# Altium PCB SolarSense.PcbDoc (part 2 of 2)
Units mm, origin at the board's own origin, x right, y up, seen from the top; angles counter-clockwise.
Board outline 200 x 150 mm, 2 copper layers (Top Layer, Bottom Layer); 190 components, 120 nets, 670 pads, 0 vias.
Unrouted connection lines stored in the file: 491.
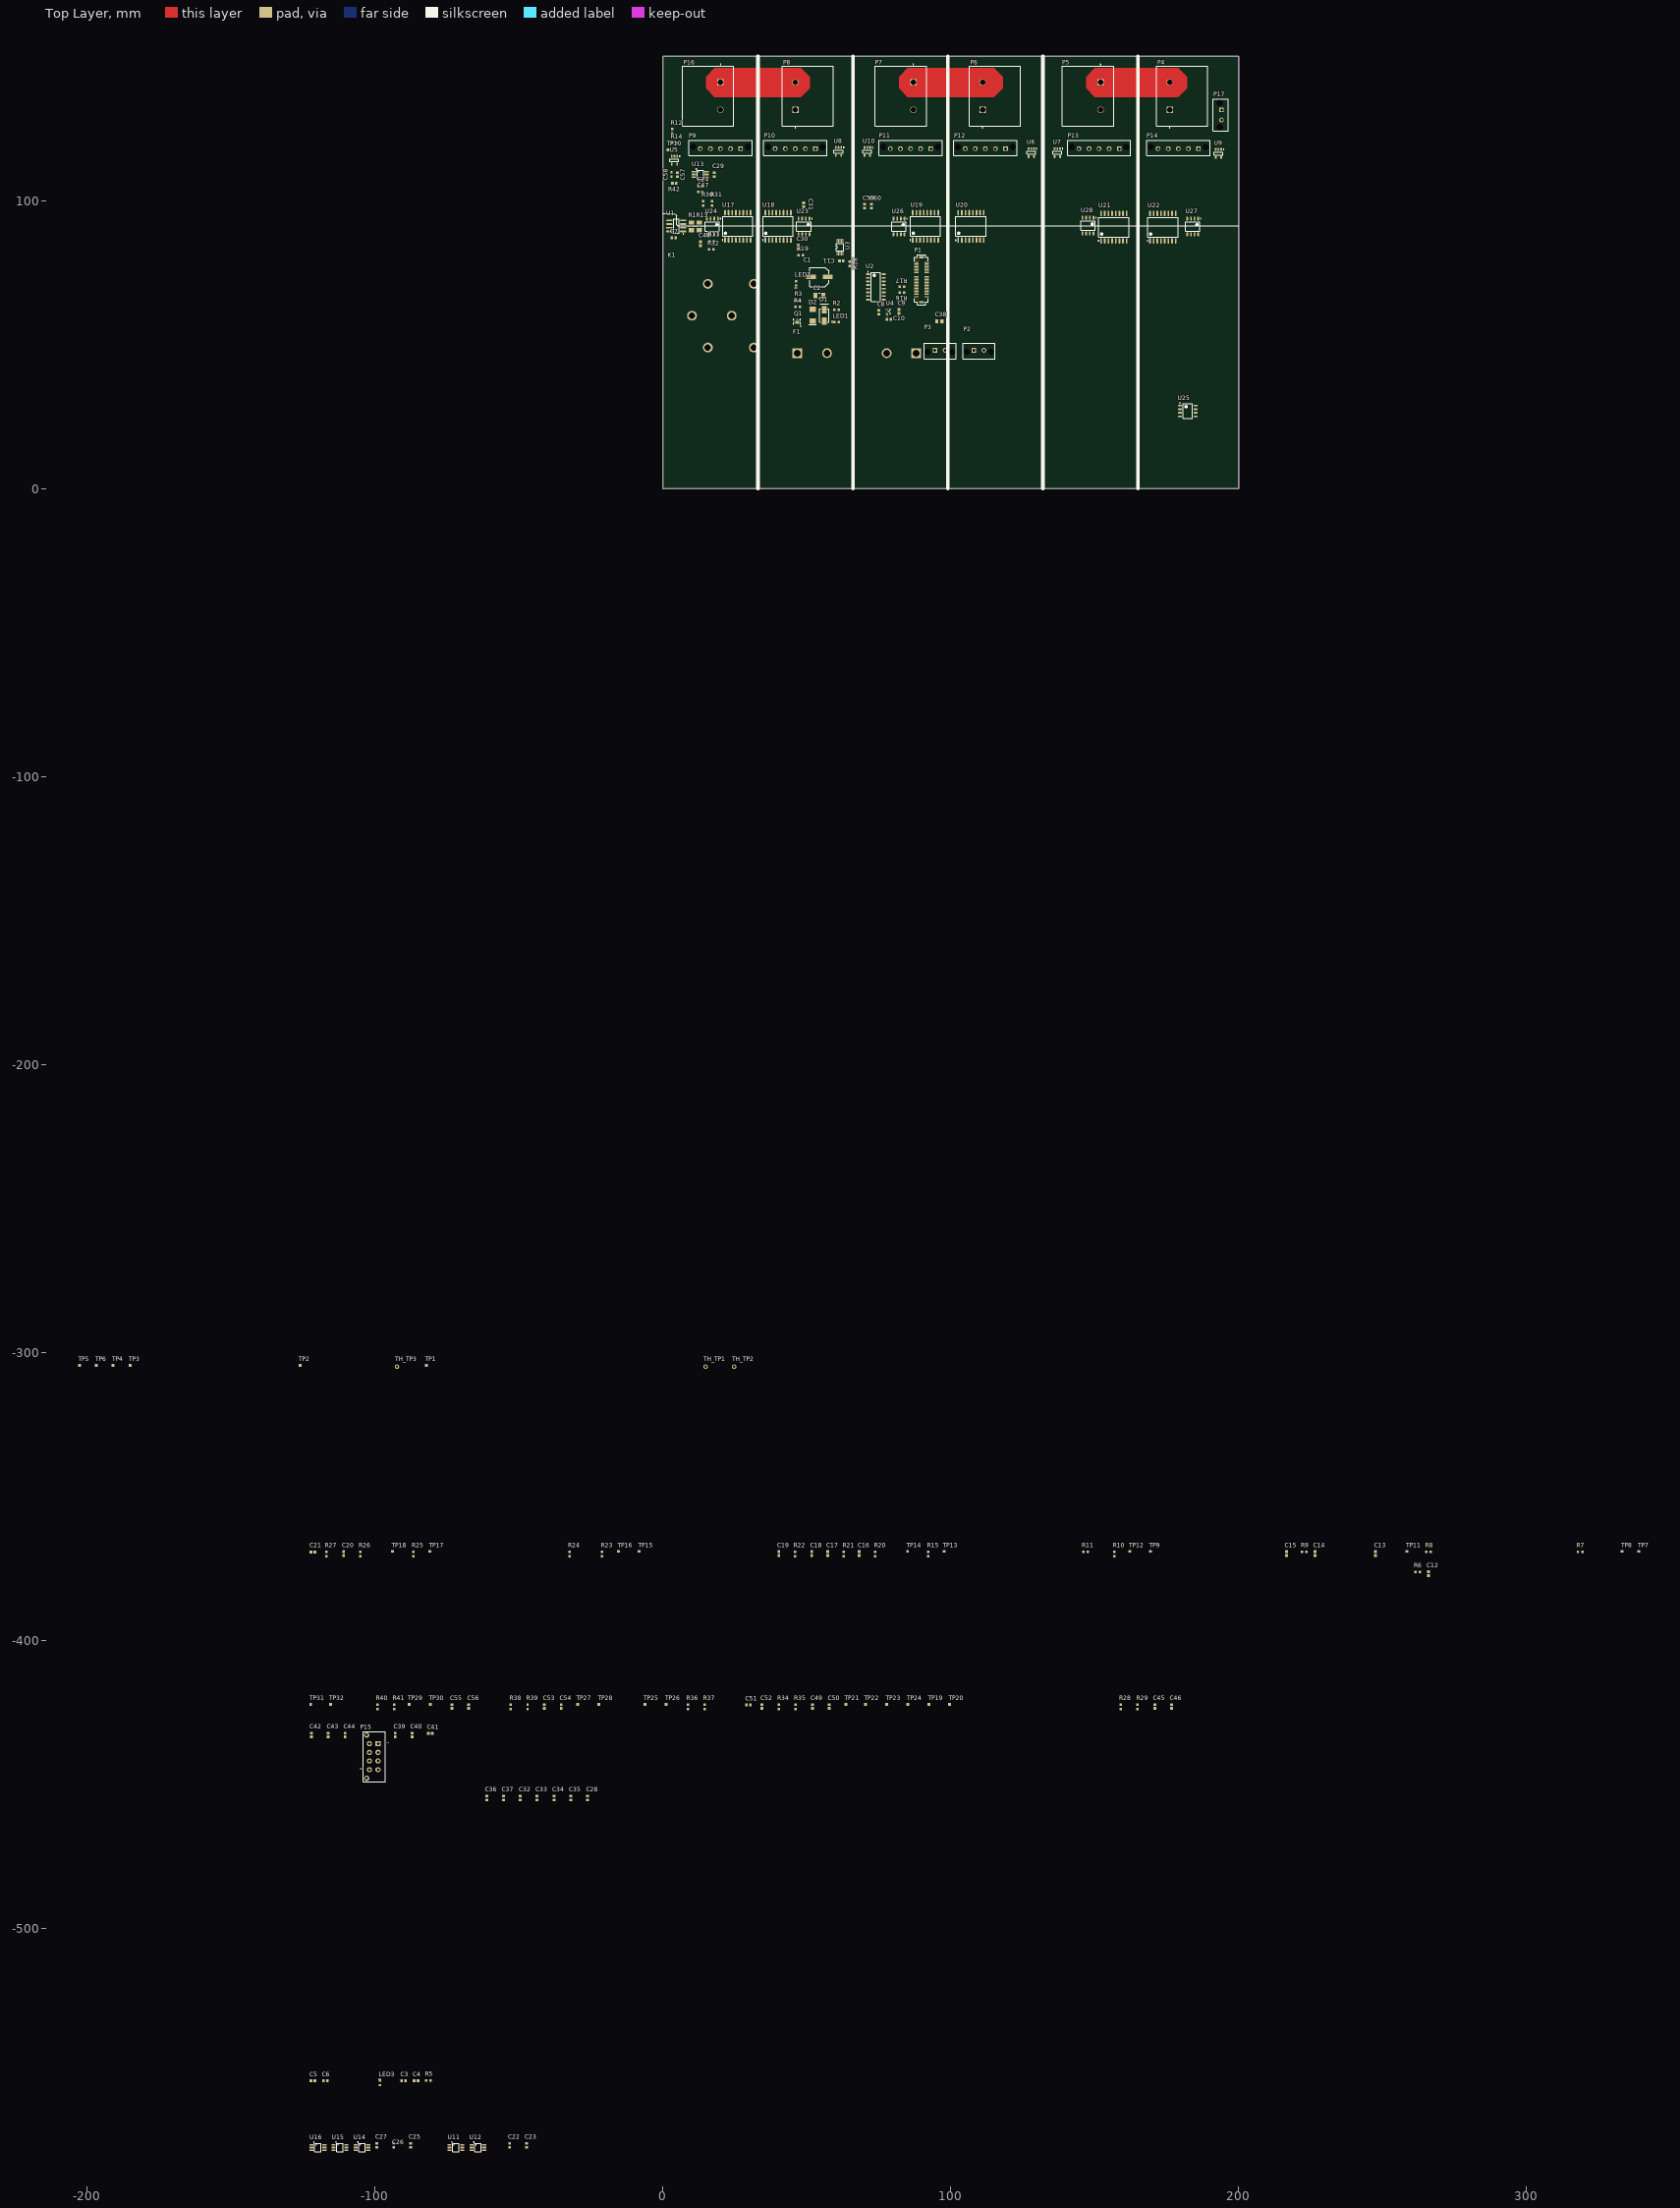
[diagram p0: Top Layer view]

## Part data (continued)
R28 R29 R30 R31 R32 R33 R34 R35 R36 R37 R38 R39 R40 R41: library part "RES 1K OHM 5% 1/10W 0603", "1k Ohm ±5% 0.1W, 1/10W Chip Resistor 0603 (1608 Metric)", Manufacturer=Yageo, Manufacturer Part Number=RC0603JR-071KL, Operating Temperature="-55°C ~ 155°C", Package / Case="0603 (1608 Metric)", Power (Watts)="0.1W, 1/10W", Resistance (Ohms)=1k, Supplier Device Package=0603, Supplier Part Number 1=311-1.0KGRCT-ND, Temperature Coefficient=±100ppm/°C, Tolerance=±5%, Category=Resistors, ComponentLink1Description=http://www.yageo.com/documents/recent/PYu-RC_Group_51_RoHS_L_7.pdf, ComponentLink1URL=http://www.yageo.com/documents/recent/PYu-RC_Group_51_RoHS_L_7.pdf, Composition="Thick Film", Failure Rate=-, Features="Moisture Resistant", Height - Seated (Max)="0.022\" (0.55mm)", Packaging="Cut Tape (CT)", Part Status=Active, Pricing 1="1=0.15, 10=0.017, 100=0.0071, 1000=0.0032, 2500=0.00278 (CAD)", RoHS="RoHS Compliant", Size / Dimension="0.063\" L x 0.031\" W (1.60mm x 0.80mm)", Stock 1=4415240, Supplier 1=Digi-Key
TH_TP1 TH_TP2 TH_TP3: library part "Thru Test Point"
TP1 TP2 TP3 TP4 TP5 TP6 TP7 TP8 TP9 TP10 TP11 TP12 TP13 TP14 TP15 TP16 TP17 TP18 TP19 TP20 TP21 TP22 TP23 TP24 TP25 TP26 TP27 TP28 TP29 TP30 TP31 TP32: library part "Test Point"
U1: "Current Sensor 10A 1 Channel Hall Effect, Open Loop Unidirectional 8-SOIC (0.154\", 3.90mm Width)", Current - Sensing=10A, Current - Supply (Max)=12mA, Frequency="DC ~ 80kHz", Manufacturer="Allegro MicroSystems, LLC", Manufacturer Part Number=ACS722LLCTR-10AU-T, Operating Temperature="-40°C ~ 150°C", Package / Case="8-SOIC (0.154\", 3.90mm Width)", Supplier Part Number 1=620-1636-1-ND, Voltage - Supply="3 V ~ 3.6 V", Accuracy=±3%, Category="Sensors, Transducers", ComponentLink1Description=http://www.allegromicro.com/~/media/Files/Datasheets/ACS722-Datasheet.ashx, ComponentLink1URL=http://www.allegromicro.com/~/media/Files/Datasheets/ACS722-Datasheet.ashx, For Measuring=DC, Linearity=±1%, Mounting Type="Surface Mount", Output="Ratiometric, Voltage", Packaging="Cut Tape (CT)", Part Status=Active, Polarization=Unidirectional, Pricing 1="1=8.22, 5=7.25, 10=6.404, 25=5.1948, 50=4.5908, 100=4.4701, 500=3.74526, 1000=3.50362 (CAD)", Response Time=5µs, RoHS="RoHS Compliant", Sensitivity=264mV/A, Sensor Type="Hall Effect, Open Loop", Stock 1=5711, Supplier 1=Digi-Key
U2: "Decoder/Demultiplexer 1 x 3:8 16-SOIC", Case/Package=SOIC, High Level Output Current=4mA, Manufacturer="ON Semiconductor", Manufacturer Part Number=MC74LVX138DR2G, Max Operating Temperature=85°C, Max Supply Voltage=3.6V, Min Operating Temperature=-40°C, Min Supply Voltage=2V, Package Quantity=2500, Quiescent Current=4uA, Supplier Part Number 1=MC74LVX138DR2GOSCT-ND, Category="Decoders, Multiplexers", ComponentLink1Description=https://datasheet.ciiva.com/6615/mc74lvx138-d-6615404.pdf?src-supplier=Digi-Key, ComponentLink1URL=https://datasheet.ciiva.com/6615/mc74lvx138-d-6615404.pdf?src-supplier=Digi-Key, ComponentLink2Description=https://datasheet.ciiva.com/16386/mc74lvx138-d-16386958.pdf?src-supplier=Future+Electronics, ComponentLink2URL=https://datasheet.ciiva.com/16386/mc74lvx138-d-16386958.pdf?src-supplier=Future+Electronics, ComponentLink3Description=https://datasheet.ciiva.com/6615/mc74lvx138-d-6615402.pdf?src-supplier=Digi-Key, ComponentLink3URL=https://datasheet.ciiva.com/6615/mc74lvx138-d-6615402.pdf?src-supplier=Digi-Key, ComponentLink4Description=https://datasheet.ciiva.com/6615/mc74lvx138-d-6615405.pdf?src-supplier=Digi-Key, ComponentLink4URL=https://datasheet.ciiva.com/6615/mc74lvx138-d-6615405.pdf?src-supplier=Digi-Key, Halogen Free="Halogen Free", Height=1.5mm, Independent Circuits=1, Lead Free="Lead Free", Length=10mm, Logic Function=Demultiplexer,Decoder, Low Level Output Current=4mA, Mount="Surface Mount", Number of Elements=1, Number of Input Lines=3, Number of Inputs=3, Number of Output Lines=8, Number of Outputs=8, Number of Pins=16, Packaging="Tape and Reel", Polarity=Inverting, Pricing 1="1=0.45000, 10=0.36100, 100=0.24590, 500=0.18442, 1000=0.13831 (USD)", Propagation Delay=23ns, RoHS=Yes, Stock 1=2170, Supplier 1=Digi-Key, Supply Type=Single, Turn-On Delay Time=23ns, Width=4mm
U3: library part "IC ADC 12-BIT VSSOP-10", "12 Bit Analog to Digital Converter 4 Input 1 Sigma-Delta 10-VSSOP", Manufacturer="Texas Instruments", Manufacturer Part Number=ADS1015IDGSR, Operating Temperature="-40°C ~ 125°C", Package / Case="10-TFSOP, 10-MSOP (0.118\", 3.00mm Width)", Supplier Device Package=10-VSSOP, Supplier Part Number 1=296-41185-1-ND, Voltage - Supply, Analog="2 V ~ 5.5 V", Architecture=Sigma-Delta, Category="Integrated Circuits (ICs)", ComponentLink1Description=http://www.ti.com/lit/ds/symlink/ads1013.pdf, ComponentLink1URL=http://www.ti.com/lit/ds/symlink/ads1013.pdf, Configuration=MUX-PGA-ADC, Data Interface=I²C, Features="PGA, Selectable Address", Input Type="Differential, Single Ended", Number of A/D Converters=1, Number of Bits=12, Number of Inputs="2, 4", Packaging="Cut Tape (CT)", Part Status=Active, Pricing 1="1=4.25, 10=3.807, 100=3.1194, 500=2.65552, 1000=2.23959 (CAD)", Ratio - S/H:ADC=-, Reference Type=Internal, RoHS="RoHS Compliant", Sampling Rate (Per Second)=3.3k, Stock 1=4084, Supplier 1=Digi-Key, Voltage - Supply, Digital="2 V ~ 5.5 V"
U4: library part "IC REG LDO 3V 0.2A 4-TDFN", Current - Limit (Min)=250mA, Current - Output=200mA, Manufacturer="Microchip Technology", Manufacturer Part Number=MIC94310-PYMT-TR, Operating Temperature="-40°C ~ 125°C", Package / Case="4-UFDFN Exposed Pad", Supplier Device Package="4-TDFN (1.2x1.6)", Supplier Part Number 1=576-4761-1-ND, Voltage - Dropout (Typical)="0.04V @ 200mA", Voltage - Input="Up to 3.6V", Voltage - Output=3V, Category="Integrated Circuits (ICs)", ComponentLink1Description=http://www.microchip.com/mymicrochip/filehandler.aspx?ddocname=en580409, ComponentLink1URL=http://www.microchip.com/mymicrochip/filehandler.aspx?ddocname=en580409, Mounting Type="Surface Mount", Packaging="Cut Tape (CT)", Part Status=Active, Pricing 1="1=0.45, 25=0.3708, 100=0.3386 (CAD)", Regulator Topology="Positive Fixed", RoHS="RoHS Compliant", Stock 1=4802, Supplier 1=Digi-Key
U5 U6 U7 U8 U9 U10: "General Purpose Amplifier 1 Circuit Rail-to-Rail SOT-23-5", Current - Output / Channel=50mA, Current - Supply=400µA, Manufacturer 1="Texas Instruments", Manufacturer Part Number 1=TLV316QDBVRQ1, Operating Temperature="-40°C ~ 125°C", Package / Case="SC-74A, SOT-753", Supplier Device Package=SOT-23-5, Supplier Part Number 1=296-45323-1-ND, Voltage - Supply, Single/Dual (±)="1.8 V ~ 5.5 V, ±0.9 V ~ 2.75 V", -3db Bandwidth=-, Amplifier Type="General Purpose", Category="Integrated Circuits (ICs)", ComponentLink1Description=http://www.ti.com/lit/ds/symlink/tlv316-q1.pdf, ComponentLink1URL=http://www.ti.com/lit/ds/symlink/tlv316-q1.pdf, Description 1="IC OP AMP GP RR 10MHZ 5-SOT-23", Mounting Type="Surface Mount", Number of Circuits=1, Output Type=Rail-to-Rail, Packaging="Cut Tape (CT)", Part Status=Active, Pricing 1="1=1.33, 10=1.185, 100=0.9234, 500=0.76276, 1000=0.60218 (CAD)", RoHS="RoHS Compliant", Slew Rate="6 V/µs", Stock 1=1747, Supplier 1=Digi-Key
U11 U12 U13 U14 U15 U16: "16 Bit Analog to Digital Converter 2 Input 1 Sigma-Delta 10-MSOP", Base Part Number=MCP3427, Manufacturer="Microchip Technology", Manufacturer Part Number=MCP3427-E/UN, Operating Temperature="-40°C ~ 125°C", Package / Case="10-TFSOP, 10-MSOP (0.118\", 3.00mm Width)", Supplier Device Package=10-MSOP, Supplier Part Number 1=MCP3427-E/UN-ND, Voltage - Supply, Analog="2.7 V ~ 5.5 V", Architecture=Sigma-Delta, Category="Integrated Circuits (ICs)", ComponentLink1Description=http://www.microchip.com/mymicrochip/filehandler.aspx?ddocname=en546216, ComponentLink1URL=http://www.microchip.com/mymicrochip/filehandler.aspx?ddocname=en546216, Configuration=MUX-PGA-ADC, Data Interface=I²C, Features="PGA, Selectable Address", Input Type=Differential, Number of Bits=16, Number of Inputs=2, Packaging=Tube, Part Status=Active, Pricing 1="1=4.32, 25=3.6064, 100=3.2704 (CAD)", Ratio - S/H:ADC=-, Reference Type=Internal, RoHS="RoHS Compliant", Sampling Rate (Per Second)=15, Stock 1=3001, Supplier 1=Digi-Key, Voltage - Supply, Digital="2.7 V ~ 5.5 V"
U17 U18 U19 U20 U21 U22: "General Purpose Digital Isolator 5000Vrms 4 Channel 100Mbps 100kV/µs CMTI 16-SOIC (0.295\", 7.50mm Width)", Manufacturer 1="Texas Instruments", Manufacturer Part Number 1=ISOW7841FDWER, Max Operating Temperature=125°C, Min Operating Temperature=-40°C, ComponentLink3Description=http://www.ti.com/lit/ds/symlink/isow7841.pdf?src-supplier=Digi-Key, ComponentLink3URL=http://www.ti.com/lit/ds/symlink/isow7841.pdf?src-supplier=Digi-Key, ComponentLink4Description=http://www.ti.com/general/docs/lit/getliterature.tsp?genericPartNumber=ISOW7841&fileType=pdf&src-supplier=Farnell, ComponentLink4URL=http://www.ti.com/general/docs/lit/getliterature.tsp?genericPartNumber=ISOW7841&fileType=pdf&src-supplier=Farnell, Number of Channels=4, Pricing 1="1=9.44000, 10=8.50000, 25=7.93000, 100=7.12000, 250=6.64000, 500=5.78000, 750=5.00000, 1000=4.90000 (USD)", RoHS=No, Stock 1=4512, Supplier 1="TI store", Supplier Part Number 1=ISOW7841FDWER
U23 U24 U25 U26 U27 U28: "I²C Digital Isolator 2500Vrms 2 Channel 1Mbps 25kV/µs CMTI 8-SOIC (0.154\", 3.90mm Width)", Case/Package=SOIC, Isolated Power=No, Manufacturer="Texas Instruments", Manufacturer Part Number=ISO1540DR, Max Operating Temperature=125°C, Max Supply Voltage=5.5V, Min Operating Temperature=-40°C, Min Supply Voltage=3V, Nominal Supply Current=3.6mA, Package Quantity=1, Supplier Part Number 1=296-34871-1-ND, Working Voltage=566V, Category="Interface ICs", Channel Type=Bidirectional, ComponentLink1Description=https://datasheet.ciiva.com/6579/iso1540-6579723.pdf?src-supplier=Digi-Key, ComponentLink1URL=https://datasheet.ciiva.com/6579/iso1540-6579723.pdf?src-supplier=Digi-Key, ComponentLink2Description=https://datasheet.ciiva.com/6579/iso1540-6579724.pdf?src-supplier=Digi-Key, ComponentLink2URL=https://datasheet.ciiva.com/6579/iso1540-6579724.pdf?src-supplier=Digi-Key, ComponentLink3Description=https://datasheet.ciiva.com/6579/iso1540-6579725.pdf?src-supplier=Digi-Key, ComponentLink3URL=https://datasheet.ciiva.com/6579/iso1540-6579725.pdf?src-supplier=Digi-Key, ComponentLink4Description=https://datasheet.ciiva.com/14196/iso1540-14196749.pdf?src-supplier=Avnet, ComponentLink4URL=https://datasheet.ciiva.com/14196/iso1540-14196749.pdf?src-supplier=Avnet, Data Rate=1Mbps, Lead Free="Lead Free", Mount="Surface Mount", Number of Channels=2, Number of Pins=8, Packaging="Tape and Reel", Pricing 1="1=4.80000, 10=4.31400, 25=4.07880, 100=3.35370, 250=3.00924, 500=2.90048, 1000=2.41102 (USD)", Propagation Delay=70ns, Pulse Width Distortion (PWD)=21ns, REACH SVHC="No SVHC", RoHS=Yes, Stock 1=10427, Supplier 1=Digi-Key

## Nets (pads, with @x,y where several pads share a name; then routed paths per layer and width w, separated by ;. In a path a pad name is that pad's centre, name@x,y a point inside that pad or via, vN(x,y) a via of type N, cw(c..) or ccw(c..) an arc to the next point about the centre after c; other vN are vias at no path point)
3.3V: P15.1
3V0: C8.1 C10.1 U3.8 U4.1
3V3: C3.1 C4.1 C5.1 C6.1 C7.1 C9.1 C28.1 C30.1 C32.1 C34.1 C36.1 C39.1 C40.1 C41.1 C42.1 C43.1 C44.1 C46.1 C48.1 C50.1 C52.1 C54.1 C56.1 C59.1 P1.40 P1.41 P1.42 P1.43 P1.44 P1.45 R5.1 R16.1 R17.1 R19.1 R32.1 R33.1 TP6.TP U1.6 U1.8 U2.6 U2.16 U4.3 U4.4 U17.1 U18.1 U19.1 U20.1 U21.1 U22.1 U23.8 U24.8 U25.8 U26.8 U27.8 U28.8
12V: C1.1 C2.1 C38.1 D1.2 K1.A P1.47 P1.48 P1.49 P1.50 P3.1 R2.1 TP5.TP
ADC_SCL_1: R30.2 TP21.TP U13.8 U24.3
ADC_SCL_2: R28.2 R34.2 R38.2 R40.2 TP19.TP TP25.TP TP29.TP TP31.TP U11.8 U23.3 U25.3 U27.3 U28.3
ADC_SCL_3: R36.2 TP27.TP U12.8 U26.3
ADC_SCL_4: U16.8
ADC_SCL_5: U15.8
ADC_SCL_6: U14.8
ADC_SDA_1: R31.2 TP22.TP U13.7 U24.2
ADC_SDA_2: R29.2 R35.2 R39.2 R41.2 TP20.TP TP26.TP TP30.TP TP32.TP U11.7 U23.2 U25.2 U27.2 U28.2
ADC_SDA_3: R37.2 TP28.TP U12.7 U26.2
ADC_SDA_4: U16.7
ADC_SDA_5: U15.7
ADC_SDA_6: U14.7
CS_MPPT1: P9.2 U17.12
CS_MPPT2: P10.2 U18.12
CS_MPPT3: P11.2 U19.12
CS_MPPT4: P12.2 U20.12
CS_MPPT5: P13.2 U21.12
CS_MPPT6: P14.2 U22.12
GND: C1.2 C2.2 C3.2 C4.2 C5.2 C6.2 C7.2 C8.2 C9.2 C10.2 C11.2 C28.2 C30.2 C32.2 C34.2 C36.2 C38.2 C39.2 C40.2 C41.2 C42.2 C43.2 C44.2 C46.2 C48.2 C50.2 C52.2 C54.2 C56.2 C59.2 D2.1 LED2.2 LED3.2 P1.1 P1.2 P1.3 P1.4 P1.26 P1.27 P1.28 P1.29 P3.2 Q1.4 Q1.8 R4.2 TP4.TP U1.5 U2.4 U2.5 U2.8 U3.1 U3.3 U4.2 U4.5 U17.2 U17.8 U18.2 U18.8 U19.2 U19.8 U20.2 U20.8 U21.2 U21.8 U22.2 U22.8 U23.5 U24.5 U25.5 U26.5 U27.5 U28.5
HV_HIGH: P4.1 P17.1 P17.2 R22.1
HV_HIGH_NEG_BAT_TERM: F1.1 P2.1 P2.2 TH_TP1.TH_TP
HV_LOW: C24.2 C29.2 C47.2 C57.2 C58.2 P9.5 P16.2 R1.2 R13.2 R14.2 TH_TP3.TH_TP U1.3 U1.4 U5.2 U13.2 U13.3 U13.9 U13.10 U17.9 U17.10 U17.15 U24.4
MISO_MPPT1: P9.1 U17.11
MISO_MPPT2: P10.1 U18.11
MISO_MPPT3: P11.1 U19.11
MISO_MPPT4: P12.1 U20.11
MISO_MPPT5: P13.1 U21.11
MISO_MPPT6: P14.1 U22.11
MOSI_MPPT1: P9.4 U17.14
MOSI_MPPT2: P10.4 U18.14
MOSI_MPPT3: P11.4 U19.14
MOSI_MPPT4: P12.4 U20.14
MOSI_MPPT5: P13.4 U21.14
MOSI_MPPT6: P14.4 U22.14
MPPT_3V3_1: C24.1 C29.1 C47.1 C57.1 R30.1 R31.1 U5.5 U13.6 U17.16 U24.1
MPPT_3V3_2: C15.1 C22.1 C31.1 C45.1 R28.1 R29.1 U8.5 U11.6 U23.1
MPPT_3V3_3: C19.1 C23.1 C51.1 C60.1 R36.1 R37.1 U10.5 U12.6 U12.10 U18.16 U19.16 U26.1
MPPT_3V3_4: C12.1 C27.1 C37.1 C49.1 R34.1 R35.1 U6.5 U16.6 U16.9 U20.16 U25.1
MPPT_3V3_5: C14.1 C26.1 C33.1 C55.1 R40.1 R41.1 U7.5 U15.6 U15.9 U15.10 U21.16 U28.1
MPPT_3V3_6: C18.1 C25.1 C35.1 C53.1 R38.1 R39.1 U9.5 U14.6 U22.16 U27.1
MPPT_GND_2: C15.2 C17.2 C22.2 C31.2 C45.2 P8.2 P10.5 P16.1 R12.1 R21.2 U8.2 U11.2 U11.3 U11.9 U18.9 U18.10 U18.15 U23.4
MPPT_GND_3: C19.2 C21.2 C23.2 C51.2 C60.2 P7.2 P8.1 P11.5 R10.1 R27.2 U10.2 U12.2 U12.3 U12.9 U19.9 U19.10 U19.15 U26.4
MPPT_GND_4: C12.2 C13.2 C27.2 C37.2 C49.2 P6.2 P7.1 P12.5 R8.2 R23.1 U6.2 U16.2 U16.3 U20.9 U20.10 U20.15 U25.4
MPPT_GND_5: C14.2 C16.2 C26.2 C33.2 C55.2 P5.2 P6.1 P13.5 R6.1 R15.2 U7.2 U15.2 U15.3 U21.9 U21.10 U21.15 U22.9 U22.10 U22.15 U28.4
MPPT_GND_6: C18.2 C20.2 C25.2 C35.2 C53.2 P4.2 P5.1 P14.5 R9.1 R25.2 U9.2 U14.2 U14.3 U14.10 U27.4
NetC11_1: C11.1 R18.2 U3.4
NetF1_2: F1.2 K1.6
NetK1_4: K1.4 R1.1 R13.1 TH_TP2.TH_TP U1.1 U1.2
NetLED1_1: LED1.1 R2.2
NetLED2_1: LED2.1 R19.2
NetLED3_1: LED3.1 R5.2
NetQ1_3: Q1.3 R3.2
NetR6_2: R6.2 R8.1 TP7.TP U6.3
NetR7_1: R7.1 U6.1 U6.4
NetR9_2: R9.2 R15.1 TP9.TP U7.3
NetR10_2: R10.2 R21.1 TP13.TP U8.3
NetR11_1: R11.1 U7.1 U7.4
NetR12_2: R12.2 R14.1 TP10.TP U5.3
NetR18_1: R18.1 TP1.TP U1.7
NetR20_1: R20.1 U8.1 U8.4
NetR22_2: R22.2 R25.1 TP15.TP U9.3
NetR23_2: R23.2 R27.1 TP17.TP U10.3
NetR24_1: R24.1 U9.1 U9.4
NetR26_1: R26.1 U10.1 U10.4
NetR42_1: R42.1 U5.1 U5.4
PA0_Temp_1: P1.25 P15.6
PA1_Temp_2: P1.24 P15.2
PA2_Temp_3: P1.23 P15.7
PA3_Temp_4: P1.22 P15.3
PA4_Temp_5: P1.21 P15.8
PA5_SPI2_SCK: U17.4 U18.4 U19.4
PA5_Temp_6: P1.20 P15.4
PA6/Relay_Sense: P1.19
PA6_SPI2_MISO: U17.6 U18.6 U19.6
PA7_: P1.18
PA7_SPI2_MOSI: U17.3 U18.3 U19.3
PA8/SOLAR_RELAY: P1.7 R3.1 R4.1 TP3.TP
PA9/MODE_SEL_0: P1.6
PA10/MODE_SEL_1: P1.5
PA15/ADC_INTERRUPT: P1.39 U3.2
PB0_: P1.17
PB1_: P1.16
PB2_: P1.15
PB3_DEMUX_A0: P1.38 U2.1
PB4_DEMUX_A1: P1.37 U2.2
PB5_DEMUX_A2: P1.36 U2.3
PB6/USART1_TX: P1.34
PB7/USART1_RX: P1.33
PB8/I2C1_SCL: P1.32 R17.2 U3.10
PB9/I2C1_SDA: P1.31 R16.2 U3.9
PB10/I2C2_SCL: P1.14 R32.2 TP23.TP U23.6 U24.6 U25.6 U26.6 U27.6 U28.6
PB11/I2C2_SDA: P1.13 R33.2 TP24.TP U23.7 U24.7 U25.7 U26.7 U27.7 U28.7
PB12/SPI2_NSS: P1.11
PB13_SPI2_SCK: P1.10 U20.4 U21.4 U22.4
PB14_SPI2_MISO: P1.9 U20.6 U21.6 U22.6
PB15_SPI2_MOSI: P1.8 U20.3 U21.3 U22.3
PC13: P1.30
SCK_MPPT1: P9.3 U17.13
SCK_MPPT2: P10.3 U18.13
SCK_MPPT3: P11.3 U19.13
SCK_MPPT4: P12.3 U20.13
SCK_MPPT5: P13.3 U21.13
SCK_MPPT6: P14.3 U22.13
SOLAR_RELAY_GND: D1.1 D2.2 K1.B LED1.2 Q1.1 Q1.2 Q1.5 Q1.6 Q1.7 TP2.TP
SPI2_CS_1: U2.15 U17.5
SPI2_CS_2: U2.14 U18.5
SPI2_CS_3: U2.13 U19.5
SPI2_CS_4: U2.12 U20.5
SPI2_CS_5: U2.11 U21.5
SPI2_CS_6: U2.10 U22.5
V_SENSE_1: C58.1 R42.2 TP11.TP U13.1
V_SENSE_2: C17.1 R20.2 TP14.TP U11.1
V_SENSE_3: C21.1 R26.2 TP18.TP U12.1
V_SENSE_4: C13.1 R7.2 TP8.TP U16.1
V_SENSE_5: C16.1 R11.2 TP12.TP U15.1
V_SENSE_6: C20.1 R24.2 TP16.TP U14.1
pads on no net: K1.2 K1.8 P1. P1.12 P1.35 P1.46 P2. P3. P9. P10. P11. P12. P13. P14. P15.0 P15.5 P17. U2.7 U2.9 U3.5 U3.6 U3.7 U11.4 U11.5 U11.10 U12.4 U12.5 U13.4 U13.5 U14.4 U14.5 U14.9 U15.4 U15.5 U16.4 U16.5 U16.10 U17.7 U18.7 U19.7 U20.7 U21.7 U22.7

## Keep-outs
Keep-Out Layer:
  the board outline again, w0.254

## Other copper
Top Layer:
  region net MPPT_GND_6: 150,146 147,143 147,139 150,136 179,136 182,139 182,143 179,146
  region net MPPT_GND_4: 85,146 82,143 82,139 85,136 115,136 118,139 118,143 115,146
  region net MPPT_GND_2: 18,146 15,143 15,139 18,136 48,136 51,139 51,143 48,146

## Silkscreen, mask and mechanical layers (free items; w line width, h text height)
Top Overlay:
  lines w0.254: 0,95.506 4,95.506 4.749,94.758 4.749,91.625 5.174,91.2 5.199,91.175 8,91.175 200,91.175 ; 4.749,91.6 5.174,91.175 5.569,91.175
  lines w1.27: 33,0 33,150 ; 66,0 66,150 ; 99,0 99,150 ; 132,0 132,150 ; 165,0 165,150

## Text inside footprints (layer, text, board x,y; h text height)
P15: Top Overlay "1" at -95.227,-435.936 h0.8 r90; Top Overlay "8" at -104.427,-445.036 h0.8 r90